# Altium PCB 4006_Shield_Kart_PCB.PcbDoc
Units mm, origin at the board's own origin, x right, y up, seen from the top; angles counter-clockwise.
Board outline 51.43 x 57.53 mm, 2 copper layers (Top Layer, Bottom Layer); 18 components, 22 nets, 96 pads, 30 vias.
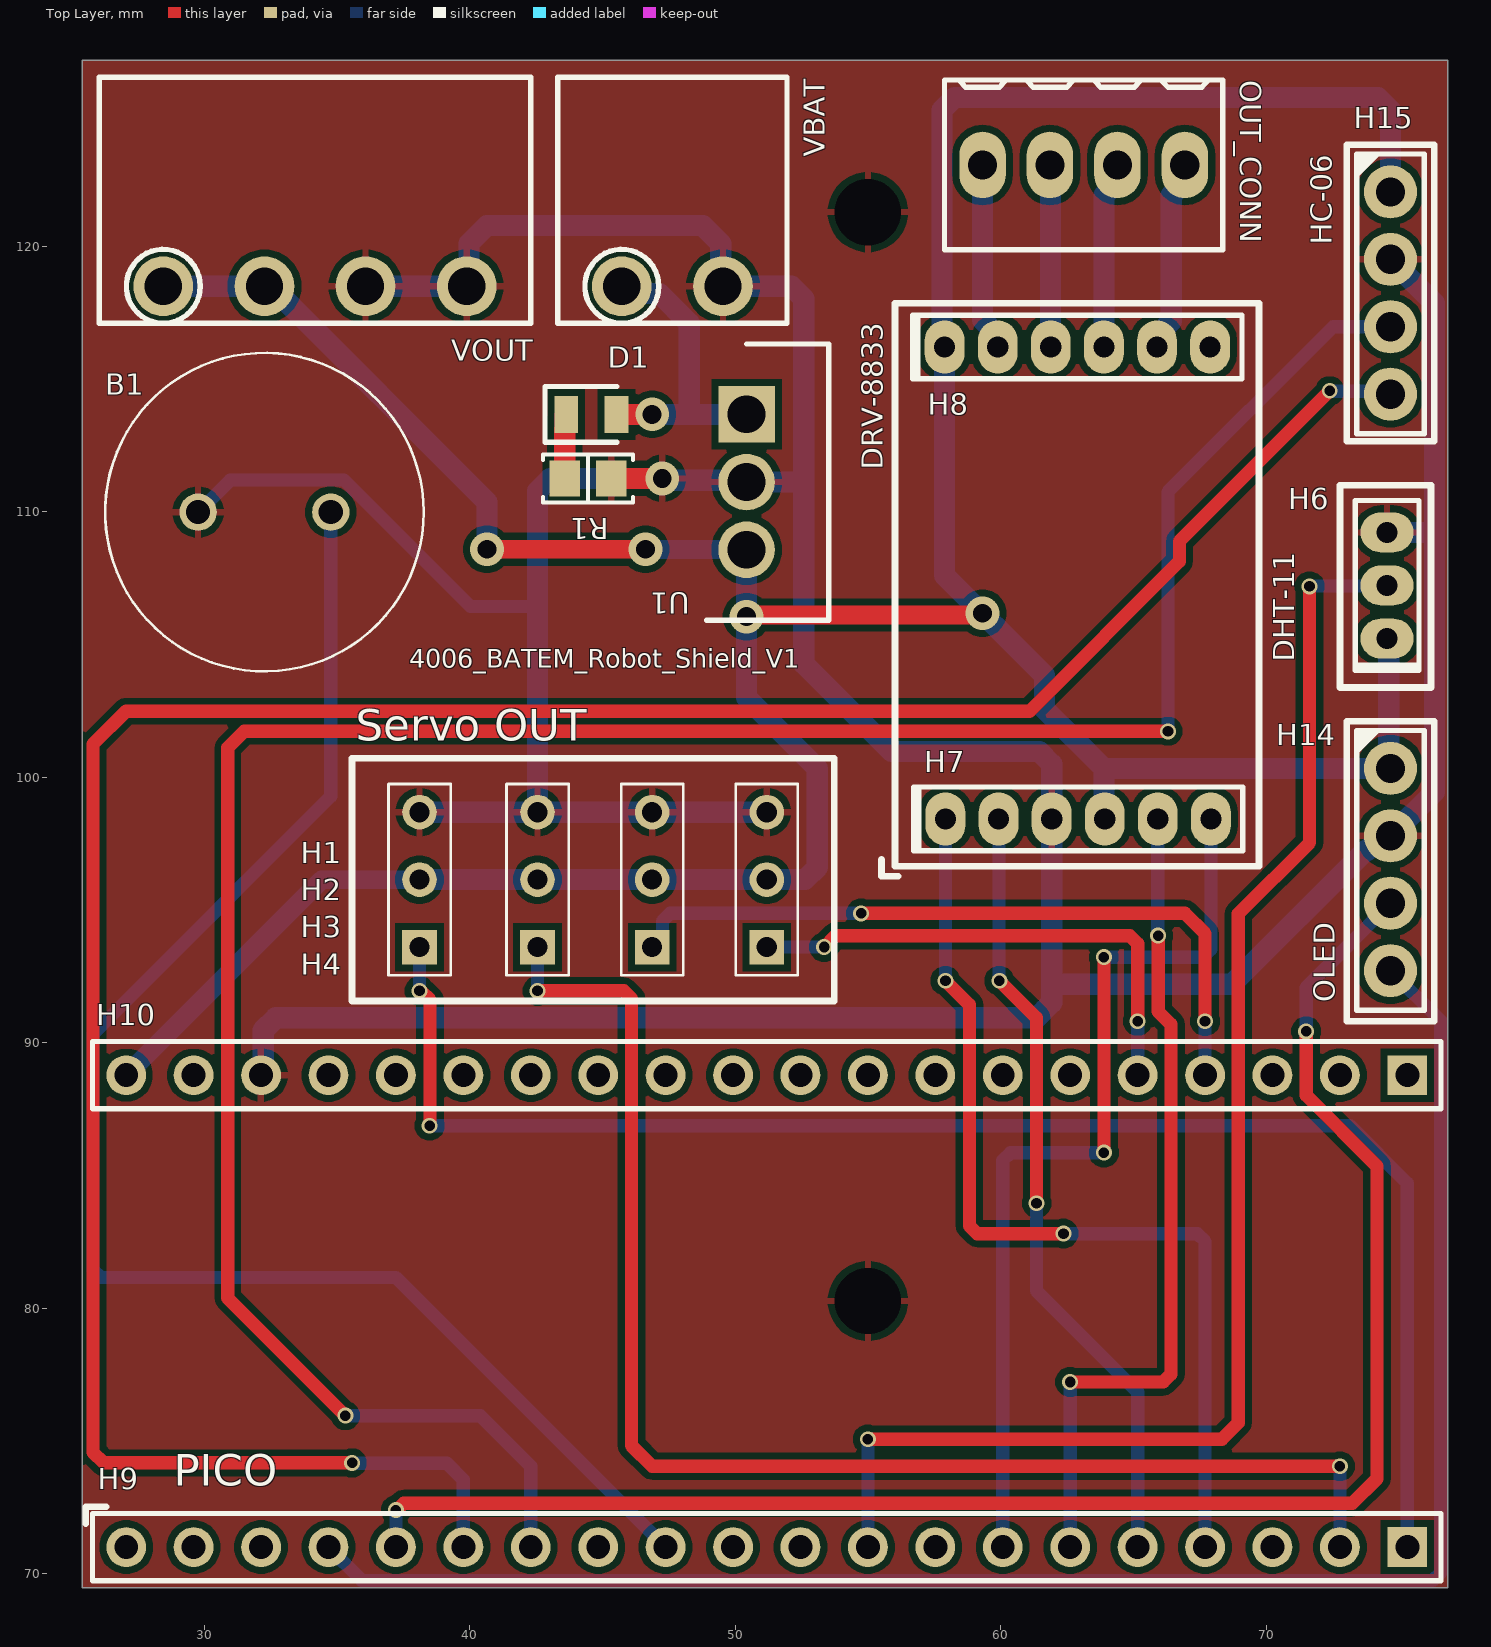
[diagram p0: Top Layer view]
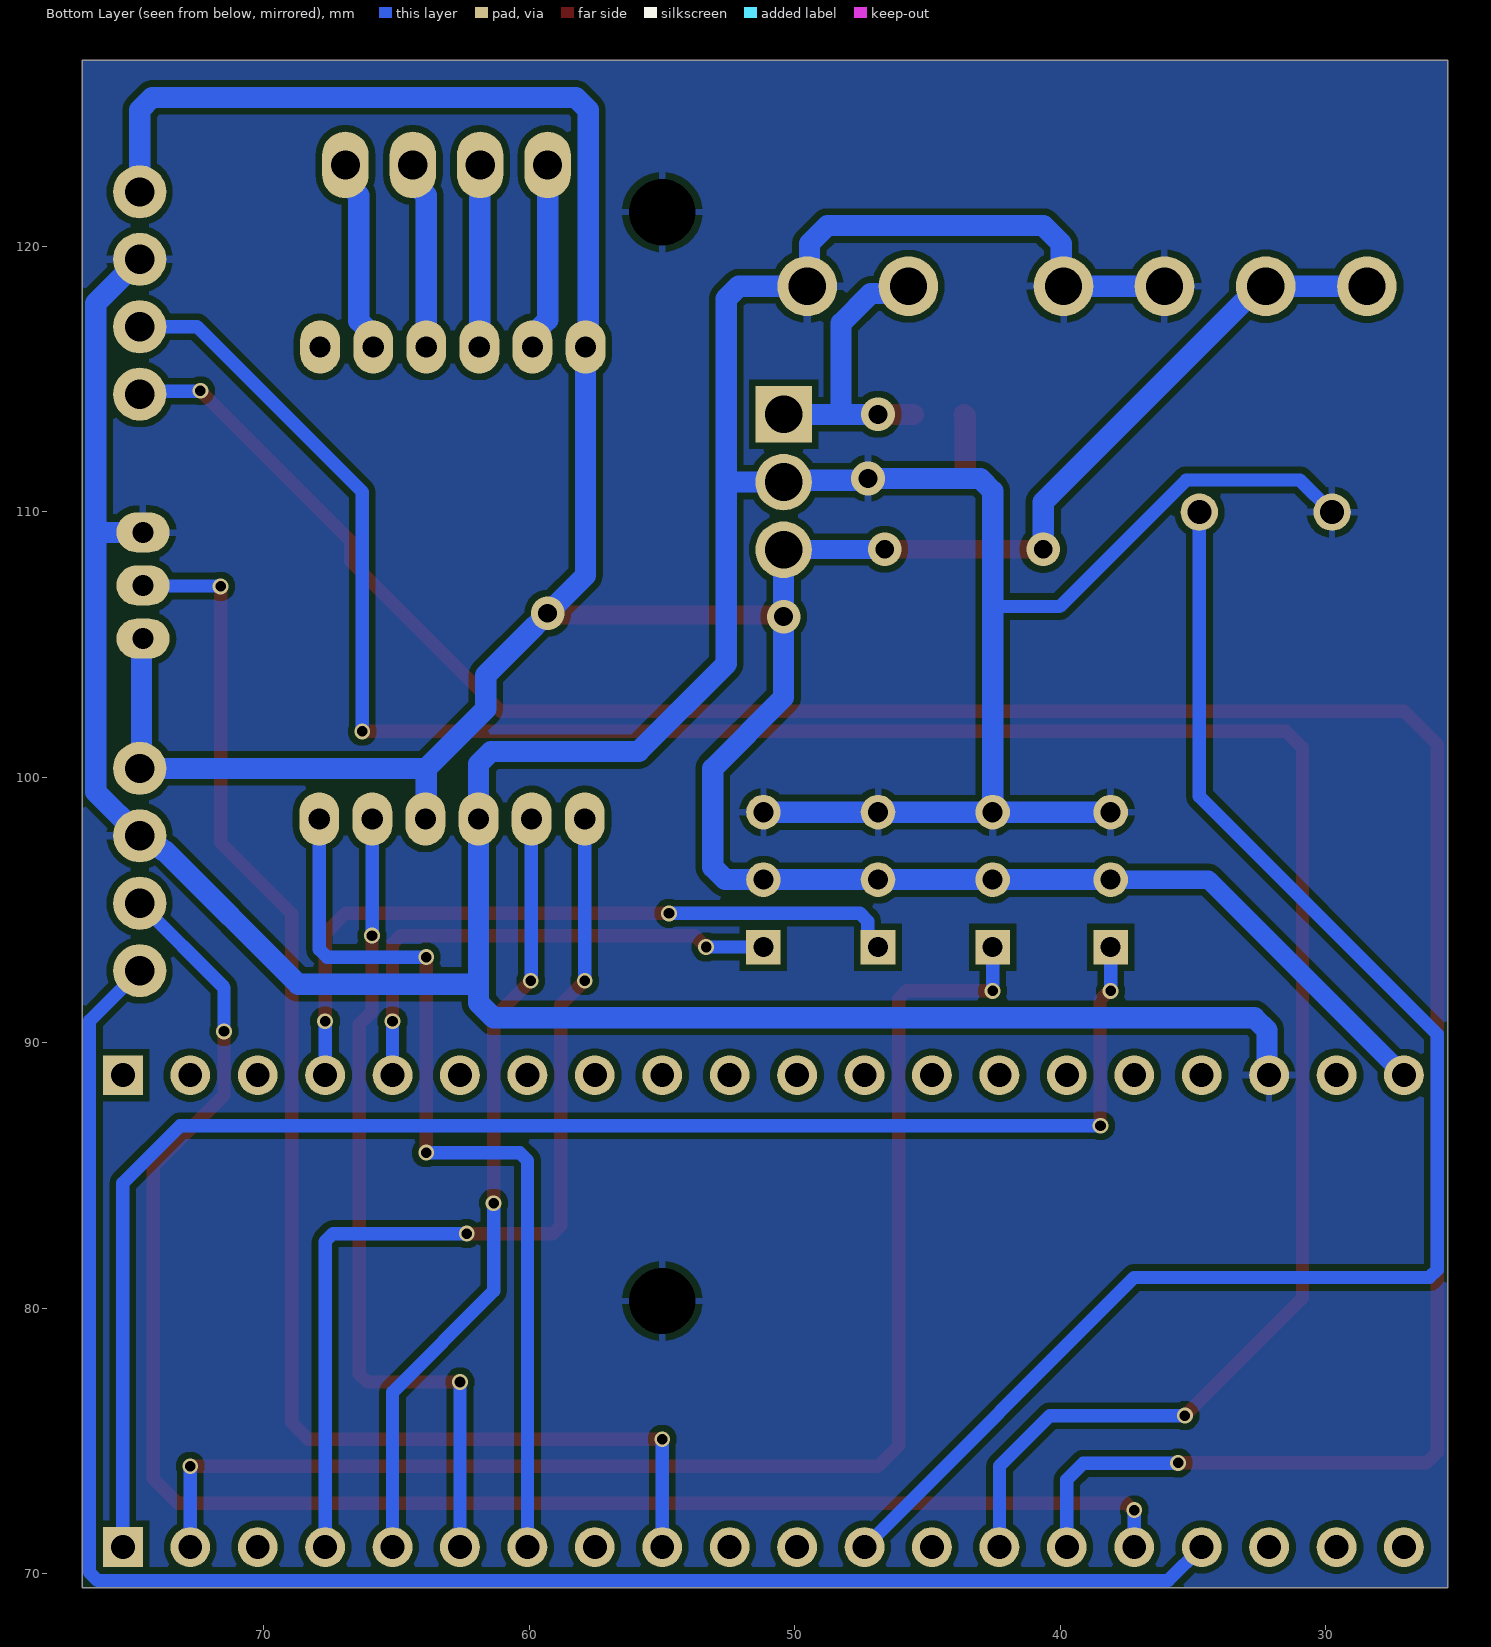
[diagram p1: Bottom Layer view, seen from below]
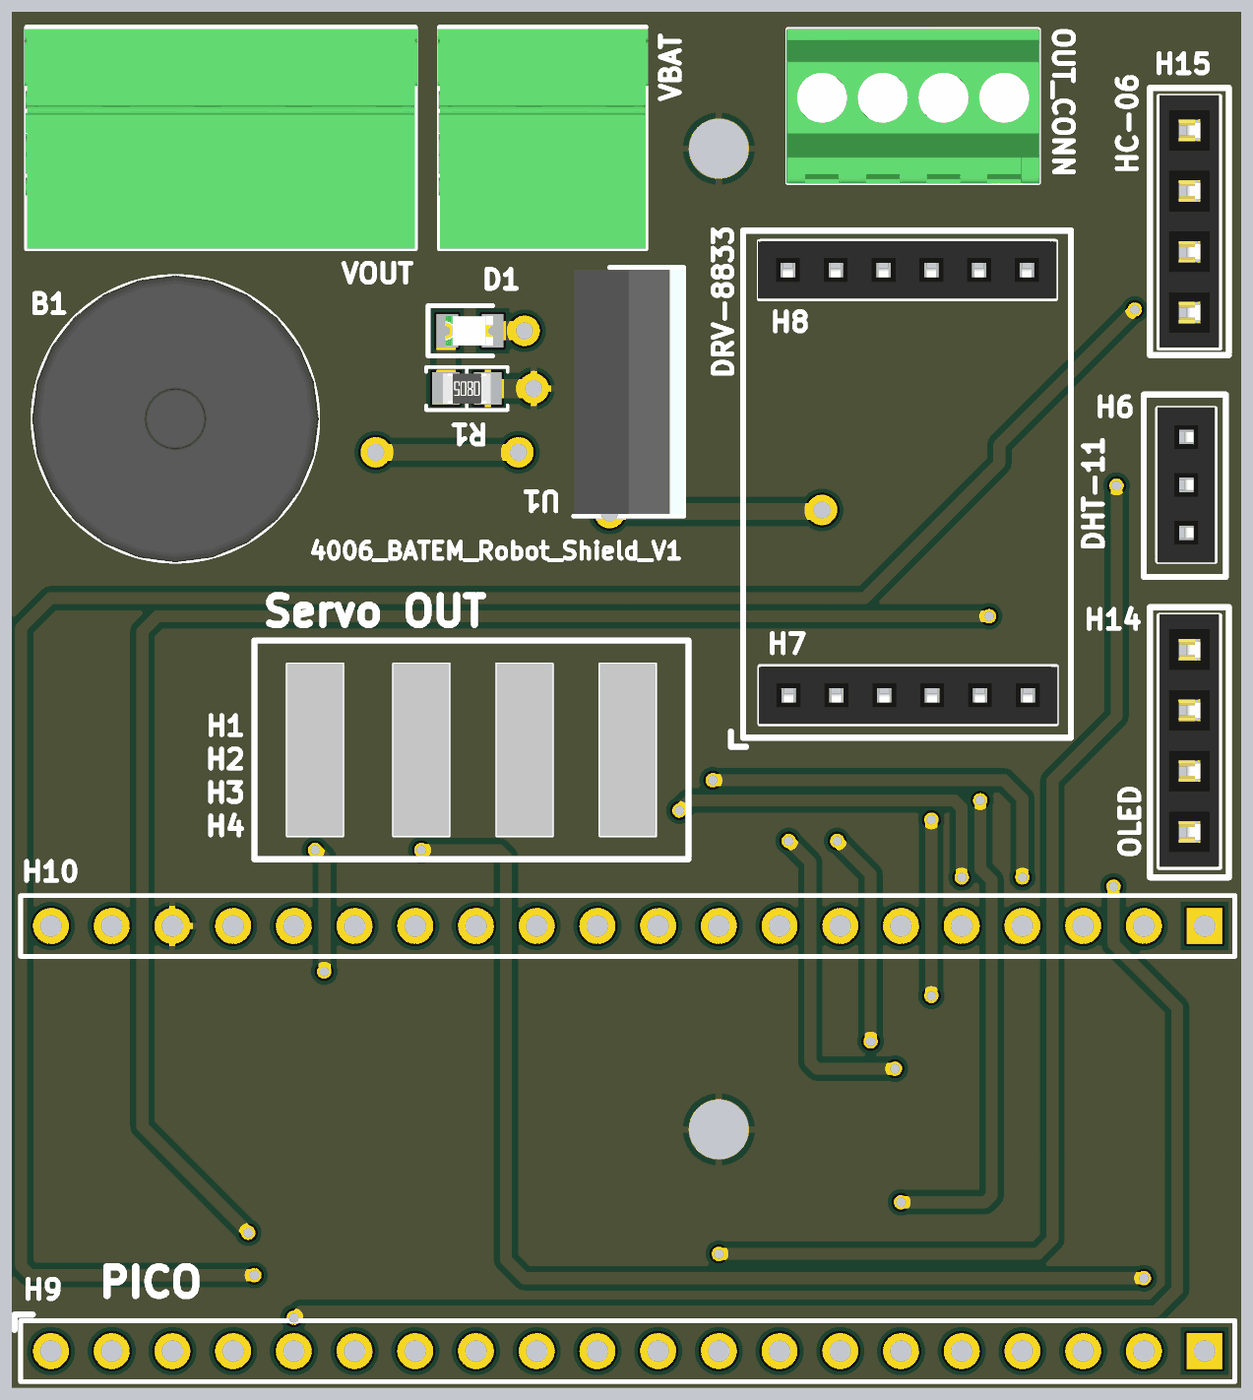
[diagram p2: 3D render of the assembled board from above, using the file's embedded part models]

## Layer stack, top to bottom
Top Solder: solder mask 0.0102, Solder Resist, Dk 3.5
Top Layer: signal copper 0.0356
Dielectric 1: dielectric 0.32, FR-4, Dk 4.8
Bottom Layer: signal copper 0.0356
Bottom Solder: solder mask 0.0102, Solder Resist, Dk 3.5

## Board outline
25.4,69.469 76.835,69.469 76.835,127 25.4,127

## Design rules (kind name [scope] priority, off if disabled: settings)
Clearance [All] p1: gap=0.254 ignorepadtopadclearanceinfootprint=FALSE except(0: Arc-Hole Track-Hole SMDPad-Hole THPad-Hole Via-Hole Fill-Hole Poly-Hole Region-Hole Text-Hole)
MinimumSolderMaskSliver [All] p1: minsoldermaskwidth=0
PolygonConnect [All] p1: connectstyle=Relief reliefconductorwidth=0.254 reliefentries=4 polygonreliefangle="90 Angle" airgapwidth=0.254
RoutingVias [All] p1: holewidth=0.711 width=1.27 viastyle="Through Hole" minholewidth=0.711 minwidth=1.27 maxholewidth=0.711 maxwidth=1.27
SilkToSolderMaskClearance [IsPad] p1: minsilkscreentomaskgap=0.01 clearancetoexposedcopper=TRUE
SolderMaskExpansion [All] p1: expansion=0.102 istentingtop=FALSE
Width [All] p1: maxlimit=1 minlimit=0.2 preferedwidth=0.5 minimp=50.000000 maximp=50.000000 favimp=50.000000
28 further rules are at their usual default settings.

## Components (designator, comment, footprint, x,y, rotation, side; value= is the part's Value field where it differs from the comment)
B1 "SD1209T5-A1" SD1209T5-A1 32.258,109.982 r0 top
D1 "150080BS75000" LEDC2012X80N 44.577,113.665 r0 top
H1 "5-146278-3" 51462783 46.863,93.599 r90 top
H2 "5-146278-3" 51462783 51.181,93.599 r90 top
H3 "5-146278-3" 51462783 38.1,93.599 r90 top
H4 "5-146278-3" 51462783 42.545,93.599 r90 top
H6 "NPPN031BFCN-RC" "SULLINS NPPN031BFCN" 74.549,107.22 r90 top
H7 "NPPN061BFCN-RC" "SULLINS NPPN061BFCN" 62.912,98.425 r0 top
H8 "NPPN061BFCN-RC" "SULLINS NPPN061BFCN" 62.881,116.205 r0 top
H9 "Header 20" HDR1X20 75.311,70.993 r180 top
H10 "Header 20" HDR1X20 75.311,88.773 r180 top
H14 "M20-7820442" "HARWIN M20-7820445" 74.676,96.52 r0 top
H15 "M20-7820442" "HARWIN M20-7820445" 74.676,118.237 r0 top
OUT_CONN "282834-4" "TE 282834-4" 63.119,123.063 r0 top
R1 "470 Ohms" "RES 0805_2012" 44.45,111.252 r180 top
U1 "L78M05CP" TO255P460X1020X2030-3P 50.419,113.665 r270 top
VBAT "OQ0232510000G" "FCI 06-381-2PIN" 47.625,121.793 r0 top
VOUT "OQ0432510000G" "FCI 06-381-4PIN" 34.163,121.793 r0 top

## Footprints (in the part's own frame and the unit in brackets; to place one, negate y for a bottom-side part, rotate by r counter-clockwise, add the part's x,y. Pads: shape width x height; smd on the part's side, far side on the other; paste and mask are expansions set on the pad)
51462783 [mm]
  rect 1.303x1.303 hole 0.76: 1(0,0)
  round 1.303 hole 0.76: 2(2.54,0) 3(5.08,0)
  silkscreen extent -1.06,-1.17 6.14,1.17, body extent -1.07,-1.17 6.15,1.17, height 8.12
"FCI 06-381-2PIN" [mm] "FCI Pluggable Terminal Block"
  round 2.25 hole 1.4: 1(-1.905,-3.302) 2(1.905,-3.302)
  silkscreen extent -4.32,-4.7 4.32,4.57, body extent -4.4,-4.7 4.4,4.5, height 7.6
"FCI 06-381-4PIN" [mm] "FCI Pluggable Terminal Block"
  round 2.25 hole 1.4: 1(-5.715,-3.302) 2(-1.905,-3.302) 3(1.905,-3.302) 4(5.715,-3.302)
  silkscreen extent -8.13,-4.7 8.13,4.57, body extent -8.21,-4.7 8.22,4.5, height 7.6
"HARWIN M20-7820445" [mm] "2.54mm DIL PC TAIL PIN HEADER ASSEMBLY"
  round 2 hole 1.1: 1(0,3.81) 2(0,1.27) 3(0,-1.27) 4(0,-3.81)
  silkscreen extent -1.27,-5.3 1.27,5.27, body extent -1.25,-5.28 1.25,5.28, height 8.5
HDR1X20 [mm] "Connector; Header; 20 Position"
  rect 1.5x1.5 hole 0.9: 1(0,0)
  round 1.5 hole 0.9: 2(2.54,0) 3(5.08,0) 4(7.62,0) 5(10.16,0) 6(12.7,0) 7(15.24,0) 8(17.78,0) 9(20.32,0) 10(22.86,0) 11(25.4,0) 12(27.94,0) 13(30.48,0) 14(33.02,0) 15(35.56,0) 16(38.1,0) 17(40.64,0) 18(43.18,0) 19(45.72,0) 20(48.26,0)
  silkscreen extent -1.27,-1.27 49.53,1.27
LEDC2012X80N [mm]
  rect 0.9x1.4 smd: 1(-0.95,0) 2(0.95,0)
  silkscreen extent -1.75,-1.05 0.95,1.05, body extent -1.03,-0.63 0.97,0.63, height 0.7
"RES 0805_2012" [mm] "Chip Resistor, 2-Leads, Body 2.00x1.25mm, IPC Medium Density"
  rect 1.15x1.35 smd: 1(-0.875,0) 2(0.875,0)
  silkscreen extent -1.7,-0.9 1.7,0.9, body extent -1,-0.62 1,0.63, height 0.6
SD1209T5-A1 [mm]
  round 1.41 hole 0.91: 1(-2.5,0) 2(2.5,0)
  silkscreen extent -6,-6 6,6, body extent -5.99,-6 5.99,6, height 9
"SULLINS NPPN031BFCN" [mm]
  oval 1.5x2 hole 0.8: 1(-2,0) 2(0,0) 3(2,0)
  silkscreen extent -3.2,-1.2 3.2,1.2, body extent -3.25,-1.2 3.25,1.2, height 4.41
"SULLINS NPPN061BFCN" [mm]
  oval 1.5x2 hole 0.8: 1(-5,0) 2(-3,0) 3(-1,0) 4(1,0) 5(3,0) 6(5,0)
  silkscreen extent -6.2,-1.2 6.2,1.2, body extent -6.25,-1.2 6.25,1.2, height 4.41
"TE 282834-4" [mm]
  oval 1.75x2.5 hole 1.1: 1(-3.81,0) 2(-1.27,0) 3(1.27,0) 4(3.81,0)
  silkscreen extent -5.24,-3.2 5.24,3.2, body extent -5.31,-3.25 5.31,3.25, height 10
TO255P460X1020X2030-3P [mm]
  rect 2.13x2.13 hole 1.42: 1(0,0)
  round 2.13 hole 1.42: 2(2.55,0) 3(5.1,0)
  silkscreen extent -2.65,-1.5 7.75,3.1, body extent -2.55,-1.5 7.65,3.1, height 19.4

## Part data
B1: "Loudspeaker or Buzzer", Manufacturer_Name=TDK, Mouser Part Number=810-SD1209T5-A1, Arrow Part Number=SD1209T5-A1, Arrow Price/Stock=https://www.arrow.com/en/products/sd1209t5-a1/tdk?region=nac, Datasheet Link=https://product.tdk.com/system/files/dam/doc/product/sw_piezo/sw_piezo/em-buzzer/catalog/electromagnetic_buzzer_sd_en.pdf, Manufacturer_Part_Number=SD1209T5-A1, Mouser Price/Stock=https://www.mouser.co.uk/ProductDetail/TDK/SD1209T5-A1?qs=6QK9sRmt5TllZYgulSSkFw%3D%3D
D1: "LED", Manufacturer_Name="Wurth Elektronik", Mouser Part Number=710-150080BS75000, Datasheet Link=https://katalog.we-online.com/led/datasheet/150080BS75000.pdf, Height=0.8mm, Manufacturer_Part_Number=150080BS75000, Mouser Price/Stock=https://www.mouser.co.uk/ProductDetail/Wurth-Elektronik/150080BS75000?qs=2kOmHSv6VfT2tBo3UPVqAQ%3D%3D
H1 H2 H3 H4: "Connector", Manufacturer_Name="TE Connectivity", Mouser Part Number=571-5-146278-3, Arrow Part Number=5-146278-3, Arrow Price/Stock=https://www.arrow.com/en/products/5-146278-3/te-connectivity?region=nac, Datasheet Link=https://www.mouser.com/datasheet/2/418/NG_CD_146278_H1-1238585.pdf, Height=8.13mm, Manufacturer_Part_Number=5-146278-3, Mouser Price/Stock=https://www.mouser.co.uk/ProductDetail/TE-Connectivity/5-146278-3?qs=bwpFY26eRVfQGObR0Vkt1g%3D%3D
H6: "CONN HDR 3POS 0.079 GOLD PCB", Current Rating (Amps)=2A, Manufacturer="Sullins Connector Solutions", Material Flammability Rating="UL94 V-0", Operating Temperature="-40°C ~ 105°C", Supplier Part Number 1=S5751-03-ND, Insulation Color=Black, ComponentLink1Description=Datasheet, ComponentLink1URL=https://drawings-pdf.s3.amazonaws.com/10483.pdf, ComponentLink2Description="DigiKey Link", ComponentLink2URL=https://www.digikey.com/en/products/detail/sullins-connector-solutions/NPPN031BFCN-RC/804805, Connector Type=Header, Contact Finish - Mating=Gold, Contact Finish - Post=Gold, Contact Finish Thickness - Mating=Flash, Contact Length - Post="0.094\" (2.40mm)", Contact Type="Female Socket", Fastening Type=Push-Pull, LastUpdated="21.06.2022 14:42:20", Lifecycle Status=Active, Minimum Order=1, Mounting Type="Through Hole", Number of Positions=3, Number of Positions Loaded=All, Number of Rows=1, Packaging=Tube, Part Number=NPPN031BFCN-RC, Part Status=Active, Pitch - Mating="0.079\" (2.00mm)", Price=0.25, Series=-, Style="Board to Board", Supplier 1=DigiKey, Termination=Solder, Insulation Height="0.173\" (4.40mm)"
H7 H8: "CONN HDR 6POS 0.079 GOLD PCB", Current Rating (Amps)=2A, Manufacturer="Sullins Connector Solutions", Material Flammability Rating="UL94 V-0", Operating Temperature="-40°C ~ 105°C", Supplier Part Number 1=S5751-06-ND, Insulation Color=Black, ComponentLink1Description=Datasheet, ComponentLink1URL=https://drawings-pdf.s3.amazonaws.com/10483.pdf, ComponentLink2Description="DigiKey Link", ComponentLink2URL=https://www.digikey.com/en/products/detail/sullins-connector-solutions/NPPN061BFCN-RC/804808, Connector Type=Header, Contact Finish - Mating=Gold, Contact Finish - Post=Gold, Contact Finish Thickness - Mating=Flash, Contact Length - Post="0.094\" (2.40mm)", Contact Type="Female Socket", Fastening Type=Push-Pull, LastUpdated="21.06.2022 14:43:22", Lifecycle Status=Active, Minimum Order=1, Mounting Type="Through Hole", Number of Positions=6, Number of Positions Loaded=All, Number of Rows=1, Packaging=Tube, Part Number=NPPN061BFCN-RC, Part Status=Active, Pitch - Mating="0.079\" (2.00mm)", Price=0.40, Series=-, Style="Board to Board", Supplier 1=DigiKey, Termination=Solder, Insulation Height="0.173\" (4.40mm)"
H9 H10: "Header, 20-Pin", LatestRevisionDate=17-Jul-2002, LatestRevisionNote="Re-released for DXP Platform.", Publisher="Altium Limited"
H14 H15: "CONN RCPT 4POS 0.1 GOLD PCB", Current Rating (Amps)=3A, Manufacturer="Harwin Inc.", Material Flammability Rating="UL94 V-0", Operating Temperature="-40°C ~ 105°C", Supplier Part Number 1=952-1791-ND, Insulation Color=Black, ComponentLink1Description=Datasheet, ComponentLink1URL=https://cdn.harwin.com/pdfs/Harwin_PC_Connectors_M20.pdf, ComponentLink2Description="DigiKey Link", ComponentLink2URL=https://www.digikey.com/en/products/detail/harwin-inc/M20-7820442/3727760, Connector Type=Receptacle, Contact Finish - Mating=Gold, Contact Finish - Post=Tin, Contact Finish Thickness - Mating=Flash, Contact Length - Post="0.118\" (3.00mm)", Contact Type="Female Socket", Fastening Type=Push-Pull, LastUpdated="21.09.2022 18:57:11", Lifecycle Status=Active, Mated Stacking Heights="11.04mm, 12.63mm", Minimum Order=1, Mounting Type="Through Hole", Number of Positions=4, Number of Positions Loaded=All, Number of Rows=1, Packaging=Tube, Part Number=M20-7820442, Part Status=Active, Pitch - Mating="0.100\" (2.54mm)", Price=0.45, Series=M20, Style="Board to Board or Cable", Supplier 1=DigiKey, Termination=Solder, Insulation Height="0.335\" (8.51mm)"
OUT_CONN: "TERM BLK 4P SIDE ENT 2.54MM PCB", Color=Green, Current=10A, Manufacturer="TE Connectivity AMP Connectors", Supplier Part Number 1=A98335-ND, Voltage=150V, ComponentLink1Description=Datasheet, ComponentLink1URL=https://www.te.com/commerce/DocumentDelivery/DDEController?Action=srchrtrv&DocNm=282834&DocType=Customer+Drawing&DocLang=English, ComponentLink2Description="DigiKey Link", ComponentLink2URL=http://digikey.com/product-detail/en/te-connectivity-amp-connectors/282834-4/A98335-ND/1153265, LastUpdated="15.01.2020 04:16:05", Lifecycle Status=Active, Mating Orientation="Horizontal with Board", Minimum Order=1, Mounting Type="Through Hole", Number of Levels=1, Packaging=Bulk, Part Number=282834-4, Part Status=Active, Pitch="0.100\" (2.54mm)", Positions Per Level=4, Price=2.68, Series=Buchanan, Supplier 1=DigiKey, Wire Gauge="16-30 AWG", Wire Termination="Screw - Rising Cage Clamp"
R1: library part CRGP0805F470R, "RES 470 OHM 1% 1/3W 0805", Device Package="0805 (2012 Metric)", Manufacturer="TE Connectivity Passive Product", Operating Temperature="-55°C ~ 155°C", Power (Watts)="0.333W, 1/3W", Supplier Device Package=0805, Supplier Part Number 1=A130473CT-ND, Temperature Coefficient=±100ppm/°C, Tolerance=±1%, ComponentLink1Description=Datasheet, ComponentLink1URL=https://www.te.com/commerce/DocumentDelivery/DDEController?Action=srchrtrv&DocNm=9-1773463-9&DocType=DS&DocLang=English, ComponentLink2Description="DigiKey Link", ComponentLink2URL=https://www.digikey.com/en/products/detail/te-connectivity-passive-product/CRGP0805F470R/8577075, Composition="Thick Film", Features="Pulse Withstanding", Height - Seated (Max)="0.026\" (0.65mm)", LastUpdated="7.03.2023 20:41:48", Lifecycle Status=Active, Minimum Order=1, Number of Terminations=2, Package / Case="0805 (2012 Metric)", Packaging=TapeAndReel, Part Number=CRGP0805F470R, Part Status=Active, PartId=28801, Price=0.03, Resistance="470 Ohms", Series=CRGP, Size / Dimension="0.079\" L x 0.049\" W (2.00mm x 1.25mm)", Supplier 1=DigiKey
U1: "Integrated Circuit", Manufacturer_Name=STMicroelectronics, Mouser Part Number=511-L78M05CP, Arrow Part Number=L78M05CP, Arrow Price/Stock=https://www.arrow.com/en/products/l78m05cp/stmicroelectronics?region=europe, Datasheet Link=http://www.st.com/web/en/resource/technical/document/datasheet/CD00000447.pdf, Height=4.6mm, Manufacturer_Part_Number=L78M05CP, Mouser Price/Stock=https://www.mouser.co.uk/ProductDetail/STMicroelectronics/L78M05CP?qs=W%252B4obUA0F3anQylSbAkrfw%3D%3D
VBAT: "TERM BLOCK HDR 2POS 90DEG 3.81MM", Color=Green, Current - UL=10A, Manufacturer="Amphenol Anytek", Operating Temperature="-40°C ~ 115°C", Supplier Part Number 1=609-3819-ND, Voltage - UL=300V, ComponentLink1Description=Datasheet, ComponentLink1URL=http://portal.fciconnect.com/Comergent//fci/drawing/oqxx32x100j0g.pdf, ComponentLink2Description="DigiKey Link", ComponentLink2URL=//digikey.com/product-detail/en/amphenol-anytek/OQ0232510000G/609-3819-ND/2261255, Contact Mating Finish=Tin, Header Orientation="90°, Right Angle", LastUpdated="16.12.2019 19:14:30", Lifecycle Status=0, Minimum Order=1, Mounting Type="Through Hole", Number of Levels=1, Number of Positions=2, Packaging=Bulk, Part Number=OQ0232510000G, Part Status=Active, Pitch="0.150\" (3.81mm)", Positions Per Level=2, Price=0.49, Series=06-381, Supplier 1=DigiKey, Termination Style=Solder, Type="Header, Male Pins, Shrouded (4 Side)"
VOUT: "TERM BLOCK HDR 4POS 90DEG 3.81MM", Color=Green, Current - UL=10A, Manufacturer="Amphenol Anytek", Operating Temperature="-40°C ~ 115°C", Supplier Part Number 1=609-3821-ND, Voltage - UL=300V, ComponentLink1Description=Datasheet, ComponentLink1URL=http://portal.fciconnect.com/Comergent//fci/drawing/oqxx32x100j0g.pdf, ComponentLink2Description="DigiKey Link", ComponentLink2URL=//digikey.com/product-detail/en/amphenol-anytek/OQ0432510000G/609-3821-ND/2261267, Contact Mating Finish=Tin, Header Orientation="90°, Right Angle", LastUpdated="16.12.2019 19:15:03", Lifecycle Status=0, Minimum Order=1, Mounting Type="Through Hole", Number of Levels=1, Number of Positions=4, Packaging=Bulk, Part Number=OQ0432510000G, Part Status=Active, Pitch="0.150\" (3.81mm)", Positions Per Level=4, Price=0.71, Series=06-381, Supplier 1=DigiKey, Termination Style=Solder, Type="Header, Male Pins, Shrouded (4 Side)"

## Free pads (board coordinates)
  round 1.524 hole 2.5: 3(54.991,80.264) 3(54.991,121.285)

## Via types
v1: diameter 0.6, hole 0.4, Top Layer to Bottom Layer, 24 vias
v2: diameter 1.27, hole 0.711, Top Layer to Bottom Layer, 6 vias

## Nets (pads, with @x,y where several pads share a name; then routed paths per layer and width w, separated by ;. In a path a pad name is that pad's centre, name@x,y a point inside that pad or via, vN(x,y) a via of type N, cw(c..) or ccw(c..) an arc to the next point about the centre after c; other vN are vias at no path point)
+5: H1.2 H2.2 H3.2 H4.2 H6.1 H7.4 H8.1 H10.20 H14.1 H15.1 U1.3 VOUT.1 VOUT.2 | length 143.7
  Top Layer w0.5: v2(50.419,106.045) v2@50.482,105.981
  Top Layer w0.7: v2(40.64,108.585) v2(46.609,108.585) ; v2@50.482,105.981 50.609,106.108 59.245,106.108 v2(59.309,106.172)
  Bottom Layer w0.5: v2(46.609,108.585) v2@46.619,108.575 ; U1.3@50.409,108.575 U1.3
  Bottom Layer w0.7: H10.20 34.417,96.139 H3.2 ; v2@46.619,108.575 U1.3@50.409,108.575
  Bottom Layer w0.8: VOUT.1 32.512,118.491 40.64,110.363 v2(40.64,108.585) ; H3.2 H4.2 H1.2 H2.2@51.054,96.139 ; U1.3 v2(50.419,106.045) 50.419,102.997 53.086,100.33 53.086,96.608 52.617,96.139 H2.2 ; H7.4 63.881,98.456 63.881,100.33 ; H6.1 74.612,105.157 74.612,100.393 H14.1 63.881,100.33 ; H15.1 74.676,125.134 74.207,125.603 58.249,125.603 57.78,125.134 57.78,116.306 H8.1 57.881,107.6 61.64,103.841 61.64,102.571 63.881,100.33
+12: D1.2 U1.1 VBAT.1 | length 11.4
  Top Layer w0.8: D1.2 v2(46.863,113.665)
  Bottom Layer w0.8: VBAT.1 45.993,118.218 47.136,118.218 48.26,117.094 48.26,113.665 ; v2(46.863,113.665) 48.26,113.665 ; U1.1 48.26,113.665
BUZZER: B1.2 H9.12 | length 58.2
  Bottom Layer w0.5: B1.2 34.758,99.274 25.797,90.313 25.797,81.446 26.09,81.153 37.211,81.153 H9.12
Data_DHT11: H6.2 H9.9 | length 53.8
  Top Layer w0.5: v1(54.991,75.057) 68.326,75.057 68.945,75.676 68.945,94.853 71.628,97.536 v1(71.628,107.188)
  Bottom Layer w0.5: H9.9 v1(54.991,75.057) ; v1(71.628,107.188) 71.644,107.204 74.533,107.204 H6.2
GND: B1.1 H1.3 H2.3 H3.3 H4.3 H6.3 H7.3 H10.18 H14.2 H15.2 pad.3 R1.1 U1.2 VBAT.2 VOUT.3 VOUT.4 | length 177.8
  Top Layer w0.8: R1.1 v2(47.244,111.252)
  Bottom Layer w0.5: B1.1 30.967,111.191 35.259,111.191 40.024,106.426 42.545,106.426
  Bottom Layer w0.8: H10.18 32.213,88.855 32.213,90.463 32.681,90.932 61.341,90.932 61.912,91.503 61.912,92.202 ; VOUT.3 VOUT.4 39.96,118.573 39.96,120.097 40.64,120.777 48.768,120.777 49.448,120.097 49.448,118.573 VBAT.2 52.109,118.491 52.578,118.022 52.578,104.267 55.88,100.965 61.443,100.965 61.912,100.496 H7.3 61.912,92.202 ; H3.3 H4.3 ; H2.3 H1.3 H4.3 ; 52.109,111.115 U1.2 50.351,111.183 47.313,111.183 v2(47.244,111.252) 43.014,111.252 42.545,110.783 42.545,106.426 H4.3 ; H6.3 76.121,109.22 ; H15.2 76.33,117.853 76.33,99.444 H14.2 74.351,97.79 73.786,97.225 73.73,97.225 68.707,92.202 61.912,92.202
IN1: H7.6 H9.7 | length 34.9
  Top Layer w0.5: v1(63.881,85.852) v1(63.881,93.218)
  Bottom Layer w0.5: H9.7 60.071,85.559 60.364,85.852 v1(63.881,85.852) ; v1(63.881,93.218) 67.619,93.218 67.912,93.511 H7.6
IN2: H7.5 H9.6 | length 31.3
  Top Layer w0.5: v1(62.611,77.216) 66.112,77.216 66.405,77.509 66.405,90.688 65.925,91.168 v1(65.925,94.028)
  Bottom Layer w0.5: H9.6 v1(62.611,77.216) ; H7.5 65.912,93.981 v1@65.913,93.98
IN3: H7.2 H9.5 | length 29.6
  Top Layer w0.5: v1(59.944,92.329) 61.341,90.932 v1(61.341,83.947)
  Bottom Layer w0.5: H7.2 59.928,98.409 59.928,92.345 v1(59.944,92.329) ; v1(61.341,83.947) 61.341,80.645 65.151,76.835 H9.5
IN4: H7.1 H9.4 | length 36.3
  Top Layer w0.5: v1(57.912,92.329) 58.817,91.424 58.817,83.097 59.11,82.804 v1(62.357,82.804)
  Bottom Layer w0.5: v1(57.912,92.329) H7.1 ; v1(62.357,82.804) 67.398,82.804 67.691,82.511 H9.4
NetD1_1: D1.1 R1.2 | length 2.4
  Top Layer w0.8: R1.2 43.575,113.127 43.577,113.129 43.577,113.615 D1.1
OUT_1: H8.2 OUT_CONN.1 | length 7.1
  Bottom Layer w0.8: OUT_CONN.1 59.309,117.216 59.881,116.644 H8.2
OUT_2: H8.3 OUT_CONN.2 | length 7.1
  Bottom Layer w0.8: OUT_CONN.2 61.865,123.047 61.865,116.221 H8.3 61.976,116.205 H8.3@62.103,116.078
OUT_3: H8.4 OUT_CONN.3 | length 7.1
  Bottom Layer w0.8: H8.4 63.881,121.923 64.389,122.431 OUT_CONN.3
OUT_4: H8.5 OUT_CONN.4 | length 7.3
  Bottom Layer w0.8: H8.5 65.881,116.644 66.421,117.184 66.421,121.923 66.929,122.431 OUT_CONN.4
PWM1: H1.1 H10.4 | length 27.4
  Top Layer w0.5: v1(54.737,94.869) 66.932,94.869 67.691,94.11 v1(67.691,90.805)
  Bottom Layer w0.5: H1.1 47.25,93.986 47.25,94.576 47.542,94.869 v1(54.737,94.869) ; H10.4 v1(67.691,90.805)
PWM2: H2.1 H10.5 | length 19.2
  Top Layer w0.5: v1(53.34,93.599) 53.763,94.022 64.858,94.022 65.151,93.729 v1(65.151,90.805)
  Bottom Layer w0.5: H2.1 v1(53.34,93.599) ; H10.5 v1(65.151,90.805)
PWM3: H3.1 H9.1 | length 58.4
  Top Layer w0.5: v1(38.1,91.948) 38.119,91.929 38.173,91.929 38.497,91.605 38.497,86.884 v1(38.481,86.868)
  Bottom Layer w0.5: v1(38.1,91.948) H3.1 ; v1(38.481,86.868) 73.152,86.868 75.311,84.709 H9.1
PWM4: H4.1 H9.2 | length 52.2
  Top Layer w0.5: v1(42.545,91.948) 45.792,91.948 46.085,91.655 46.085,74.819 46.863,74.041 v1(72.771,74.041)
  Bottom Layer w0.5: v1(42.545,91.948) H4.1 ; H9.2 v1(72.771,74.041)
RX: H9.14 H15.3 | length 93.5
  Top Layer w0.5: v1(35.306,75.946) 30.877,80.375 30.877,101.108 31.496,101.727 v1(66.294,101.727)
  Bottom Layer w0.5: v1(35.306,75.946) 40.386,75.946 42.291,74.041 H9.14 ; v1(66.294,101.727) 66.294,110.744 72.517,116.967 H15.3
SCL: H9.16 H14.3 | length 63
  Top Layer w0.5: v1@37.211,72.351 37.504,72.644 73.24,72.644 74.168,73.572 74.168,85.344 71.501,88.011 v1(71.501,90.424)
  Bottom Layer w0.5: H9.16 v1(37.211,72.39) ; v1(71.501,90.424) 71.501,92.075 H14.3
SDA: H9.17 H14.4 | length 66
  Bottom Layer w0.5: H9.17 35.925,69.739 76.27,69.739 76.565,70.034 76.565,90.821 H14.4
TX: H9.15 H15.4 | length 98.9
  Top Layer w0.5: v1(35.56,74.168) 26.201,74.168 25.797,74.572 25.797,101.235 27.043,102.481 61.079,102.481 66.725,108.127 66.725,108.889 v1(72.39,114.554) ; H15.4@74.389,114.14 H15.4
  Bottom Layer w0.5: v1(35.56,74.168) 35.579,74.149 39.135,74.149 39.751,73.533 H9.15 ; v1(72.39,114.554) 72.409,114.535 74.568,114.535 H15.4
pads on no net: H8.6 H9.3 H9.8 H9.10 H9.11 H9.13 H9.18 H9.19 H9.20 H10.1 H10.2 H10.3 H10.6 H10.7 H10.8 H10.9 H10.10 H10.11 H10.12 H10.13 H10.14 H10.15 H10.16 H10.17 H10.19

## Polygon pours and split planes (outlines as drawn)
GND on Top Layer "GND_L01_P001" (solid, pour order 1): 25.4,127 76.835,127 76.835,69.469 25.4,69.469
GND on Bottom Layer "GND_L02_P003" (solid, pour order 3): 76.835,69.469 25.4,69.469 25.4,127 76.835,127

## Silkscreen, mask and mechanical layers (free items; w line width, h text height)
Top Overlay:
  lines w0.254: 25.527,71.882 25.527,72.517 26.289,72.517 ; 55.499,96.901 55.499,96.266 56.134,96.266 ; 35.56,91.567 53.721,91.567 53.721,100.711 35.56,100.711 35.56,91.567 ; 56.007,96.647 69.723,96.647 69.723,117.856 56.007,117.856 56.007,96.647 ; 72.771,103.378 76.2,103.378 76.2,110.998 72.771,110.998 72.771,103.378 ; 73.025,90.805 76.327,90.805 76.327,102.108 73.025,102.108 73.025,90.805 ; 73.025,112.649 76.327,112.649 76.327,123.825 73.025,123.825 73.025,112.649
  text "HC-06" at 72.471,120.061 h0.8 r90
  text "DRV-8833" at 55.553,111.579 h0.8 r90
  text "DHT-11" at 71.047,104.34 h0.8 r90
  text "4006_BATEM_Robot_Shield_V1" at 37.719,104.13 h0.7
  text "Servo OUT" at 35.706,101.365 h1.2
  text "OLED" at 72.571,91.513 h0.8 r90
  text "PICO" at 28.848,73.298 h1.2